# EAGLE board mega (EAGLE 9.6.2)
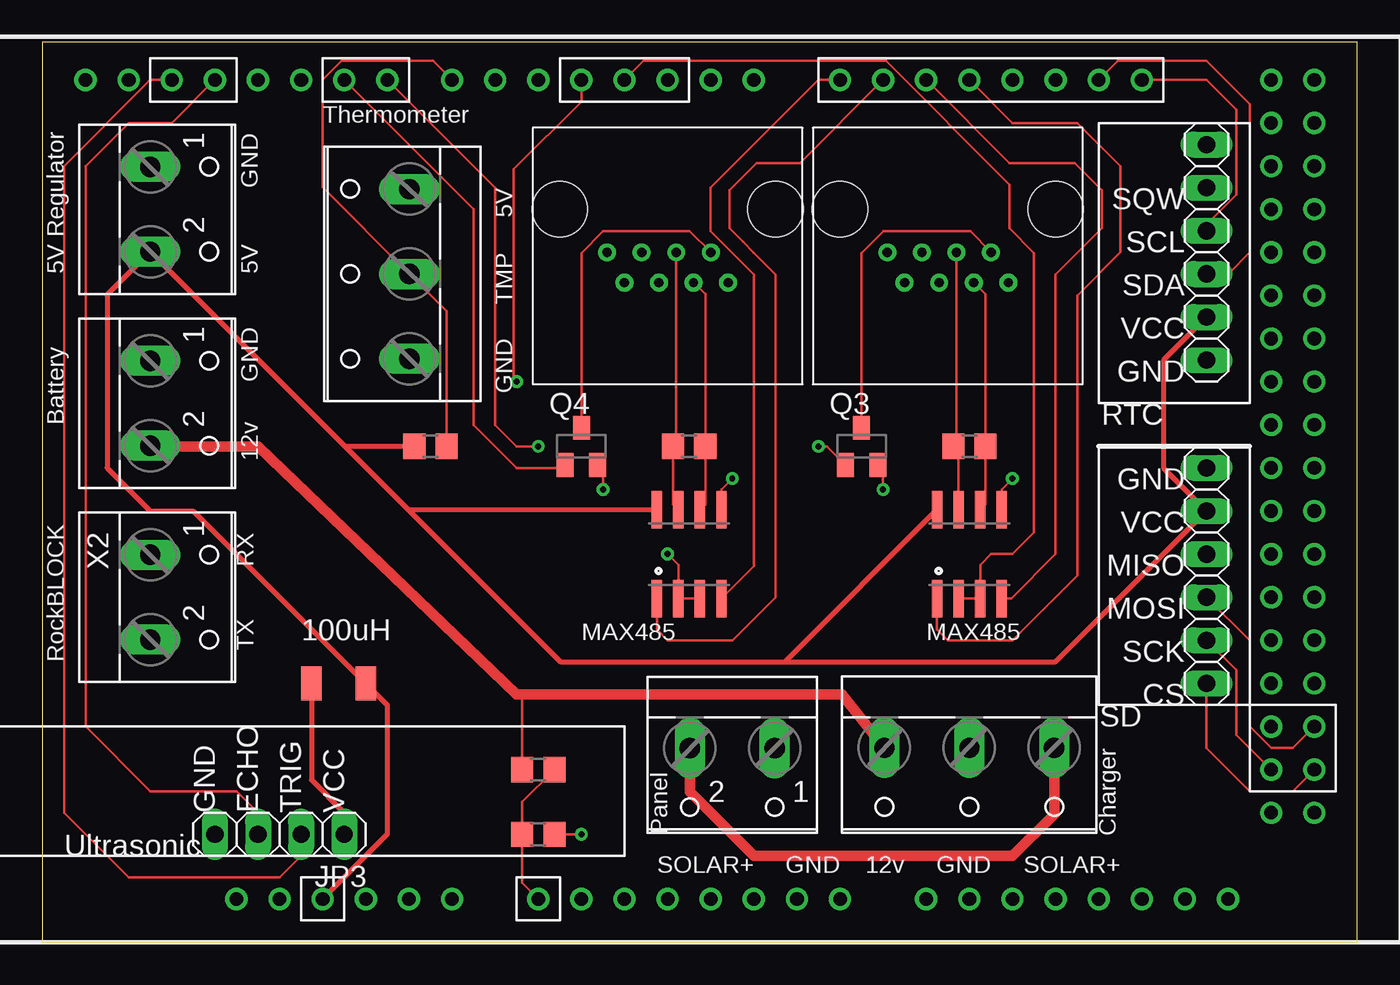
[diagram p0: board, top side]
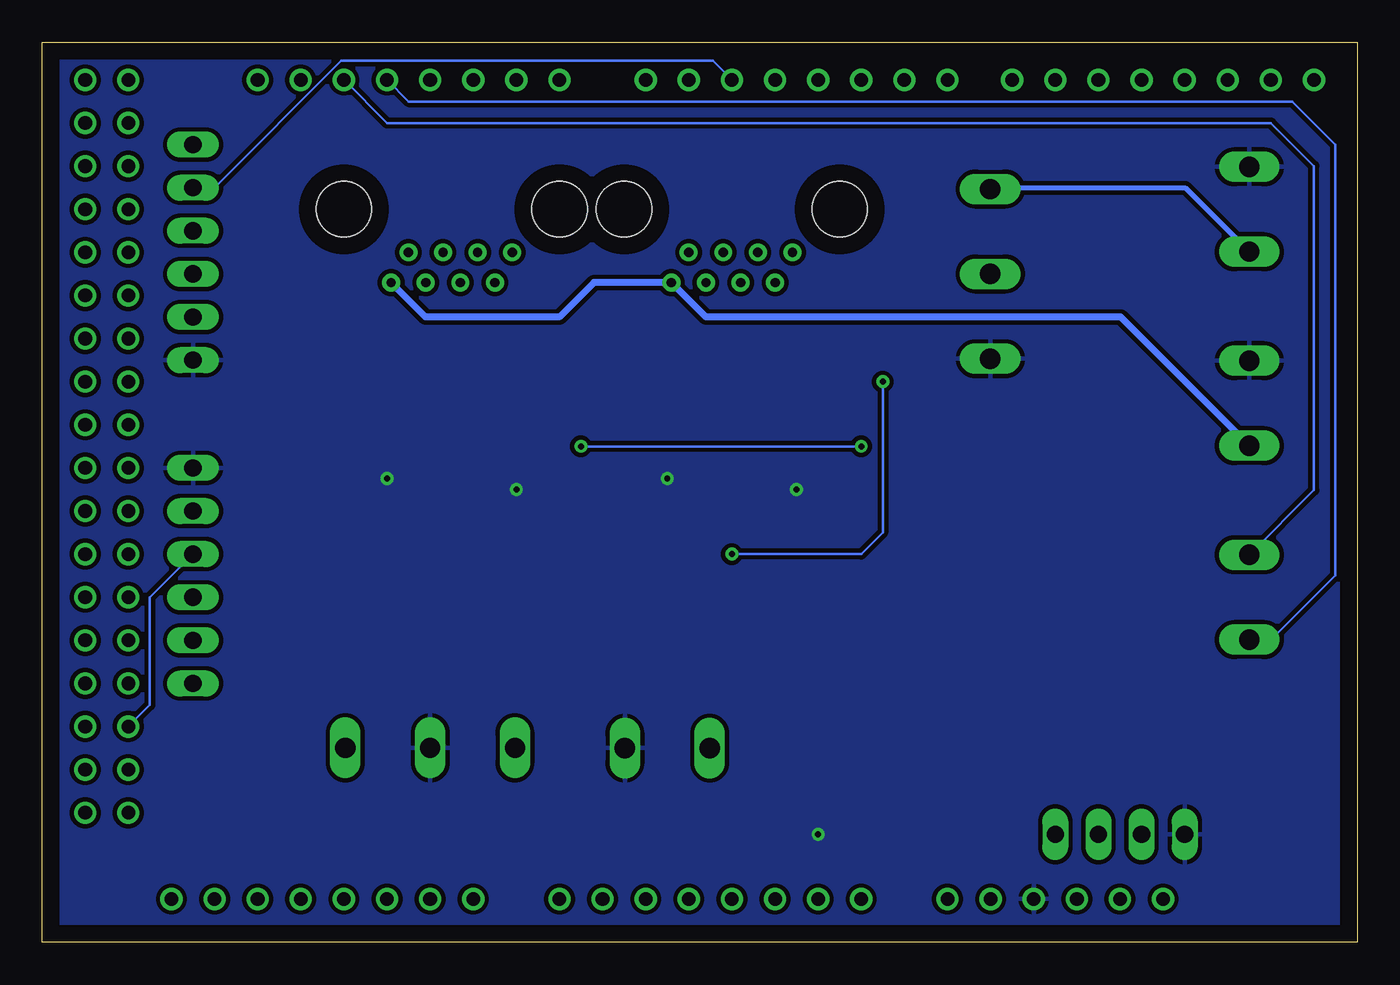
[diagram p1: board, bottom side, seen from below]

Size 77.45 x 53.01 mm. Coordinates in mm from the lower left corner, seen from the top.
Outline: 0,0 77.45,0 77.45,53.01 0,53.01 0,0
Copper layers (1*16): Top 0.035mm / dielectric 1.5mm / Bottom 0.035mm
Design rules "default": minimum track width 6mil, minimum drill 0.35mm, track to track 6mil, track to pad 6mil, pad to pad 6mil, via to via 6mil, smd to smd 6mil, copper to edge 40mil, drill to drill 6mil, minimum pad ring 10mil, minimum via ring 8mil, stop-mask expansion 4mil, vias tented up to drill 0mil, thermal gap 10mil

## Footprints (pad centres in the part's own frame; a part is rotated, then mirrored left to right if it is on the bottom)
1X06 = drill 1.016 long: 1 -6.35,0; 2 -3.81,0; 3 -1.27,0; 4 1.27,0; 5 3.81,0; 6 6.35,0
1X04 = drill 1.016 long: 1 -3.81,0; 2 -1.27,0; 3 1.27,0; 4 3.81,0
ETHERNET = drill 0.55: BOT0 -3.57,1.78; BOT1 -1.53,1.78; BOT2 0.51,1.78; BOT3 2.55,1.78; TOP0 -2.55,0; TOP1 -0.51,0; TOP2 1.53,0; TOP3 3.57,0 | hole 3.25: -6.35,-2.54; 6.35,-2.54
NLFV32T-101K-EF = smd 1.2 x 2: P$1 0,0; P$2 3.2,0
SOT23 = smd 1 x 1.4: 1 -0.95,-1.1; 2 0.95,-1.1; 3 0,1.1
R0805 = smd 1.3 x 1.5: 1 -0.95,0; 2 0.95,0
SO08 = smd 0.61 x 2.21: 1 -1.905,-2.616; 2 -0.635,-2.616; 3 0.635,-2.616; 4 1.905,-2.616; 5 1.905,2.616; 6 0.635,2.616; 7 -0.635,2.616; 8 -1.905,2.616
MEGAOUTLINE = drill 0.8: 0 12.7,24.13; 1 10.16,24.13; 2 7.62,24.13; 3 5.08,24.13; 3V3 -15.24,-24.13; 4 2.54,24.13; 5 0,24.13; 5V -12.7,-24.13; 6 -2.54,24.13; 7 -5.08,24.13; 8 -8.89,24.13; 9 -11.43,24.13; 10 -13.97,24.13; 11 -16.51,24.13; 12 -19.05,24.13; 13 -21.59,24.13; 14 17.78,24.13; 15 20.32,24.13; 16 22.86,24.13; 17 25.4,24.13; 18 27.94,24.13; 19 30.48,24.13; 20 33.02,24.13; 21 35.56,24.13; 22 43.18,21.59; 23 45.72,21.59; 24 43.18,19.05; 25 45.72,19.05; 26 43.18,16.51; 27 45.72,16.51; 28 43.18,13.97; 29 45.72,13.97; 30 43.18,11.43; 31 45.72,11.43; 32 43.18,8.89; 33 45.72,8.89; 34 43.18,6.35; 35 45.72,6.35; 36 43.18,3.81; 37 45.72,3.81; 38 43.18,1.27; 39 45.72,1.27; 40 43.18,-1.27; 41 45.72,-1.27; 42 43.18,-3.81; 43 45.72,-3.81; 44 43.18,-6.35; 45 45.72,-6.35; 46 43.18,-8.89; 47 45.72,-8.89; 48 43.18,-11.43; 49 45.72,-11.43; 50 43.18,-13.97; 51 45.72,-13.97; 52 43.18,-16.51; 53 45.72,-16.51; A0 0,-24.13; A1 2.54,-24.13; A2 5.08,-24.13; A3 7.62,-24.13; A4 10.16,-24.13; A5 12.7,-24.13; A6 15.24,-24.13; A7 17.78,-24.13; A8 22.86,-24.13; A9 25.4,-24.13; A10 27.94,-24.13; A11 30.48,-24.13; A12 33.02,-24.13; A13 35.56,-24.13; A14 38.1,-24.13; A15 40.64,-24.13; AREF -26.67,24.13; GND@1 -24.13,24.13; GND@2 -10.16,-24.13; GND@3 -7.62,-24.13; GND@4 43.18,24.13; GND@5 45.72,24.13; GND@6 43.18,-19.05; GND@7 45.72,-19.05; RESET -17.78,-24.13; VIN -5.08,-24.13
W237-102 = drill 1.194 long: 1 -2.5,-1.27; 2 2.5,-1.27
W237-103 = drill 1.194 long: 1 -5,-1.29; 2 0,-1.29; 3 5,-1.29

## Placement (x,y rotation side)
JP1  [1X06]  68.58,21.59 270 top
JP2  [1X06]  68.58,40.64 270 top
JP3  [1X04]  13.97,6.35 180 top
JP4  ETHERNET  [ETHERNET]  36.83,40.64 180 top
JP5  ETHERNET  [ETHERNET]  53.34,40.64 180 top
L1  100uH  [NLFV32T-101K-EF]  19.05,15.24 180 top
Q3  [SOT23]  48.26,29.21 0 top
Q4  [SOT23]  31.75,29.21 0 top
R1  120  [R0805]  38.1,29.21 180 top
R3  4.7k  [R0805]  22.86,29.21 0 top
R7  120  [R0805]  54.61,29.21 180 top
R8  15k  [R0805]  29.21,10.16 0 top
R9  4.7k  [R0805]  29.21,6.35 180 top
U$1  MAX485  [SO08]  38.1,22.86 0 top
U$2  MAX485  [SO08]  54.61,22.86 0 top
U$3  MEGA_DEVICE  [MEGAOUTLINE]  29.21,26.67 0 top
X1  [W237-102]  7.62,43.18 270 top
X2  [W237-102]  7.62,20.32 270 top
X3  [W237-102]  7.62,31.75 270 top
X6  [W237-103]  54.61,10.16 180 top
X7  [W237-102]  40.64,10.16 180 top
X8  [W237-103]  20.32,39.37 90 top

## Library data of the parts
JP1-JP3 = pinhead
JP4 JP5 = Ethernet
L1 = NLFV32T-101K-EF
Q3 Q4 = semicon-smd-ipc
R1 R3 R7-R9 = rcl; SPICEPREFIX: R
U$1 U$2 = MAX485
U$3 = ArduinoMegaOutline
X1-X3 X7 = con-wago-500; MPN: 237-102; OC_FARNELL: unknown; OC_NEWARK: 70K9898
X6 X8 = con-wago-500; MPN: 237-103; OC_FARNELL: unknown; OC_NEWARK: 18M7116

## Nets
+5V: JP1.2 JP2.5 L1.P$1 R3.1 U$1.8 U$2.8 U$3.5V X1.2 X8.3
+12V: JP4.BOT0 JP5.BOT0 R8.1 X3.2 X6.3
GND: JP1.1 JP2.6 JP3.4 Q3.2 Q4.2 R9.1 U$1.5 U$2.5 U$3.GND@2 X1.1 X3.1 X6.2 X7.1 X8.1
N$1: JP4.TOP1 R1.2 U$1.7
N$2: JP4.BOT1 R1.1 U$1.6
N$3: JP5.TOP1 R7.2 U$2.7
N$4: JP5.BOT1 R7.1 U$2.6
N$5: U$2.1 U$3.17
N$6: U$2.4 U$3.16
N$7: U$1.1 U$3.15
N$8: U$1.4 U$3.14
N$9: JP2.2 U$3.2
N$10: U$2.2 U$2.3 U$3.3
N$11: U$1.2 U$1.3 U$3.4
N$12: JP2.3 U$3.21
N$13: JP2.4 U$3.20
N$14: JP1.6 U$3.53
N$15: JP1.5 U$3.52
N$16: JP1.4 U$3.51
N$17: JP1.3 U$3.50
N$18: JP3.2 U$3.13
N$19: JP3.3 U$3.12
N$20: Q3.1 U$3.8
N$21: JP4.TOP0 Q4.3
N$22: JP5.TOP0 Q3.3
N$24: Q4.1 U$3.9
N$26: JP3.1 L1.P$2
N$27: R8.2 R9.2 U$3.A0
N$28: X6.1 X7.2
N$29: R3.2 U$3.7 X8.2
RX: U$3.19 X2.1
TX: U$3.18 X2.2

## Tracks (layer width: path | path; a pad name or v marks a point on that pad's centre or on a via)
+5V
  Top 0.152: 21.55,25.48 21.59,25.48 | 21.89,29.23 R3.1
  Top 0.305: JP2.5 66.04,34.29 66.04,27.94 JP1.2 59.69,16.51 43.74,16.51 | U$2.8 43.74,16.51 | 21.59,25.48 U$1.8 | U$3.5V 20.32,6.35 20.32,13.97 L1.P$1 8.89,25.4 6.35,25.4 3.81,27.94 3.81,38.14 X1.2 17.8,29.23 | 17.8,29.23 21.55,25.48 30.52,16.51 43.74,16.51 | 17.8,29.23 21.89,29.23
  Bottom 0.305: X1.2 10.12,44.45 21.53,44.45 X8.3
+12V
  Top 0.152: 27.94,14.61 28.26,14.29 R8.1
  Top 0.406: 6.39,29.21 X3.2
  Top 0.61: X6.3 47.09,14.61 27.94,14.61 12.7,29.21 6.39,29.21
  Bottom 0.406: JP5.BOT0 54.88,36.83 46.99,36.83 44.96,38.86 JP4.BOT0 38.37,36.83 13.93,36.83 X3.2
GND  (via drill 0.35)
  Top 0.152: Q3.2 49.53,27.79 v49.53,26.67 | v33.02,26.67 33.02,27.79 Q4.2 | v31.75,6.35 R9.1 | U$1.5 40,26.67 v40.64,27.3 | U$2.5 56.52,26.67 v57.15,27.3
  pour Bottom (isolate 0.254): 0,52.07 0,0 77.47,0 77.47,53.34 0,53.34
N$1
  Top 0.152: U$1.7 37.15,25.79 R1.2 37.34,29.4 JP4.TOP1
N$2
  Top 0.152: U$1.6 39.05,25.79 R1.1 39.05,38.17 JP4.BOT1
N$3
  Top 0.152: U$2.7 53.97,28.89 R7.2 53.85,29.4 JP5.TOP1
N$4
  Top 0.152: U$2.6 55.56,25.79 R7.1 55.56,38.17 JP5.BOT1
N$5
  Top 0.152: U$2.1 52.7,18.41 53.34,17.78 57.15,17.78 60.96,21.59 60.96,38.1 63.5,40.64 63.5,45.72 60.96,48.26 57.15,48.26 U$3.17
N$6
  Top 0.152: U$2.4 57.07,20.24 59.69,22.86 59.69,39.34 62.41,42.05 62.41,44.31 60.82,45.9 56.97,45.9 U$3.16
N$7
  Top 0.152: U$1.1 36.19,18.41 36.83,17.78 40.64,17.78 43.18,20.32 43.18,39.34 41.89,40.62 41.26,41.26 40.46,42.05 40.46,44.31 42.05,45.9 44.63,45.9 U$3.15
N$8
  Top 0.152: U$1.4 41.91,22.15 41.91,39.34 39.37,41.88 39.37,44.45 45.72,50.8 U$3.14
N$9
  Bottom 0.152: JP2.2 67.31,44.45 59.84,51.92 37.95,51.92 U$3.2
N$10
  Top 0.152: U$2.2 U$2.3 55.24,22.23 55.88,22.86 57.15,22.86 58.42,24.13 58.42,40.61 56.97,42.05 56.97,44.63 49.68,51.92 35.41,51.92 U$3.3
N$11  (via drill 0.35)
  Top 0.152: U$1.3 U$1.2 37.47,22.23 v36.83,22.86 | U$3.4 31.75,49.53 27.76,45.54 27.76,34.29 27.76,33.2 v27.94,33.02
  Bottom 0.152: v27.94,33.02 27.94,24.13 29.21,22.86 v36.83,22.86
N$12
  Top 0.152: JP2.3 68.58,42.29 70.33,44.04 70.33,49.05 68.58,50.8 U$3.21
N$13
  Top 0.152: U$3.20 63.35,51.92 68.58,51.92 71.12,49.38 71.12,40.64 69.85,39.37 JP2.4
N$14
  Top 0.152: JP1.6 68.58,11.43 71.12,8.89 73.66,8.89 U$3.53
N$15
  Top 0.152: U$3.52 70.33,12.22 70.33,15.24 70.33,15.65 70.33,16.03 JP1.5
N$16
  Top 0.152: JP1.4 71.12,17.78 71.12,12.7 72.39,11.43 73.66,11.43 U$3.51
N$17
  Bottom 0.152: JP1.3 71.12,20.32 71.12,13.97 U$3.50
N$18
  Top 0.152: U$3.13 6.35,50.8 1.27,45.72 1.27,7.62 5.08,3.81 13.97,3.81 15.24,5.08 JP3.2
N$19
  Top 0.152: U$3.12 7.62,48.26 5.08,48.26 2.54,45.72 2.54,12.7 6.35,8.89 11.43,8.89 12.7,7.62 JP3.3
N$20  (via drill 0.35)
  Top 0.152: U$3.8 26.67,44.45 26.67,30.48 27.94,29.21 v29.21,29.21 | v45.72,29.21 46.21,29.21 Q3.1
  Bottom 0.152: v29.21,29.21 v45.72,29.21
N$21
  Top 0.152: Q4.3 31.75,40.61 33.04,41.89 38.13,41.89 JP4.TOP0
N$22
  Top 0.152: Q3.3 48.26,40.61 49.55,41.89 54.67,41.89 JP5.TOP0
N$24
  Top 0.152: U$3.9 25.4,43.18 25.4,30.48 27.94,27.94 30.63,27.94 Q4.1
N$26
  Top 0.305: L1.P$2 15.85,9.55 17.78,7.62 JP3.1
N$27
  Top 0.152: R8.2 28.26,8.26 R9.2 28.26,3.49 U$3.A0
N$28
  Top 0.61: X7.2 38.14,8.85 41.91,5.08 57.15,5.08 59.61,7.54 X6.1
N$29
  Top 0.152: R3.2 23.81,37.17 X8.2 16.51,44.47 16.51,50.8 17.63,51.92 23.01,51.92 U$3.7
RX
  Bottom 0.152: X2.1 2.54,26.63 2.54,45.72 5.08,48.26 57.15,48.26 U$3.19
TX
  Bottom 0.152: U$3.18 55.88,49.53 3.81,49.53 1.27,46.99 1.27,21.59 5.04,17.82 X2.2

## Text on the board
tPlace: Thermometer | GND | 5V | SQW | SCL | TMP | 5V Regulator | 5V | SDA | VCC | GND | GND | GND | RTC | Battery | 12v | GND | VCC | RX | MISO | MOSI | TX | 100uH | MAX485 | MAX485 | SCK | RockBLOCK | CS | SD | Charger | GND | ECHO | TRIG | VCC | Panel | Ultrasonic | SOLAR+ | GND | 12v | GND | SOLAR+